# Altium PCB ZS-007.PcbDoc
Units mil, origin at the board's own origin, x right, y up, seen from the top; angles counter-clockwise.
Board outline 876.19 x 616.62 mil, 2 copper layers (Top Layer, Bottom Layer); 14 components, 10 nets, 35 pads, 13 vias.
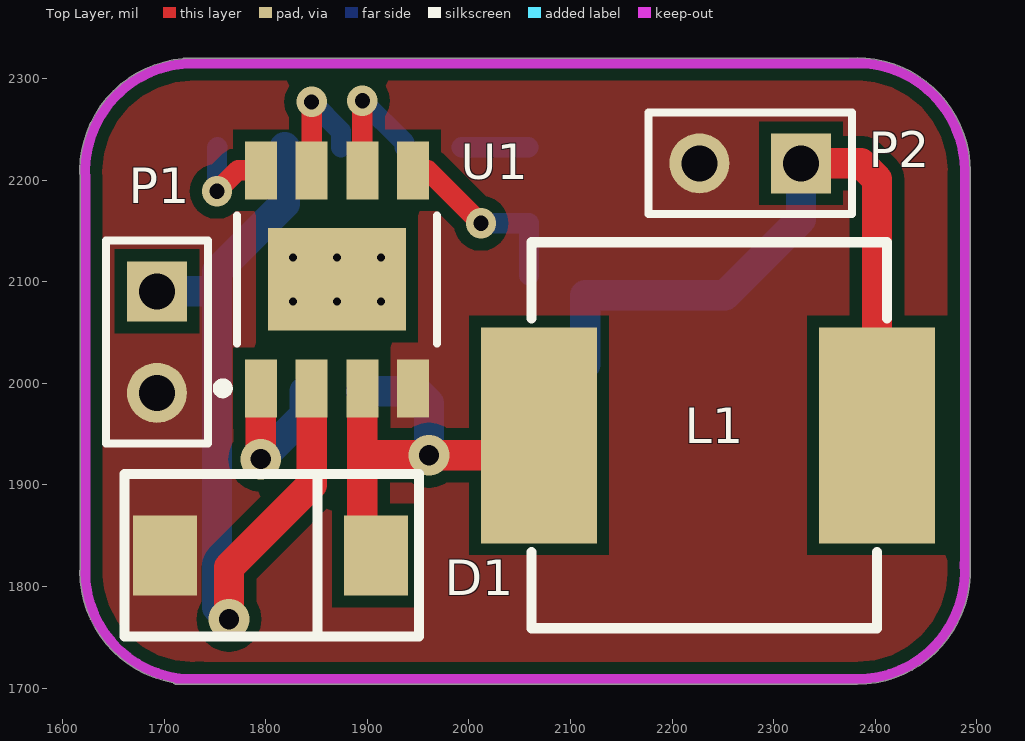
[diagram p0: Top Layer view]
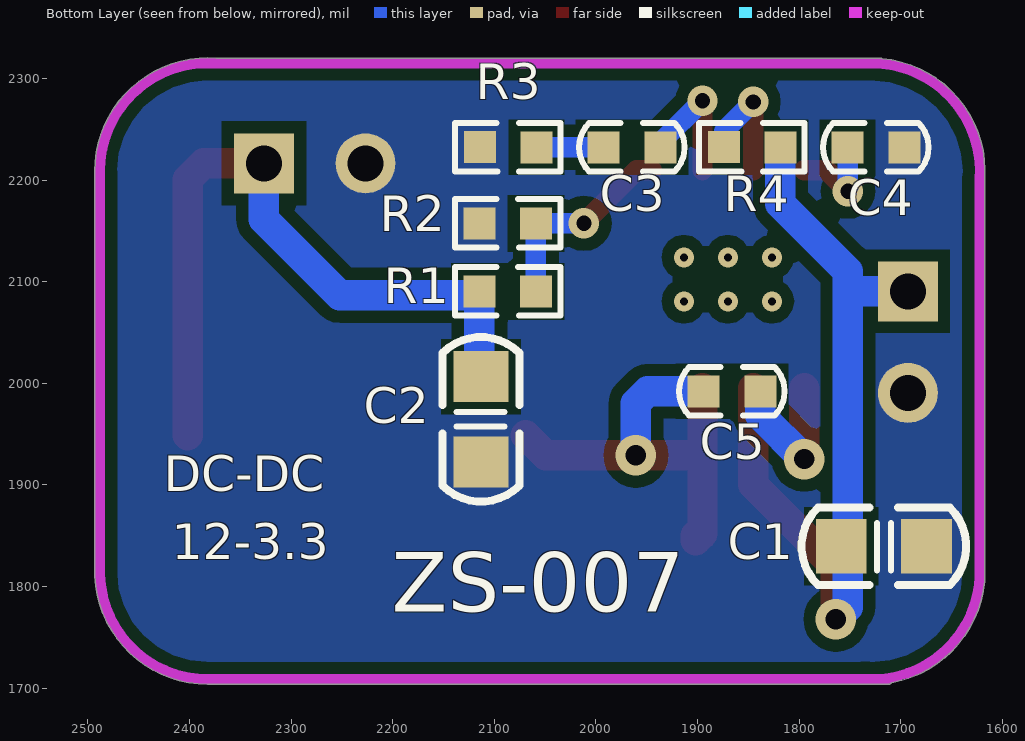
[diagram p1: Bottom Layer view, seen from below]
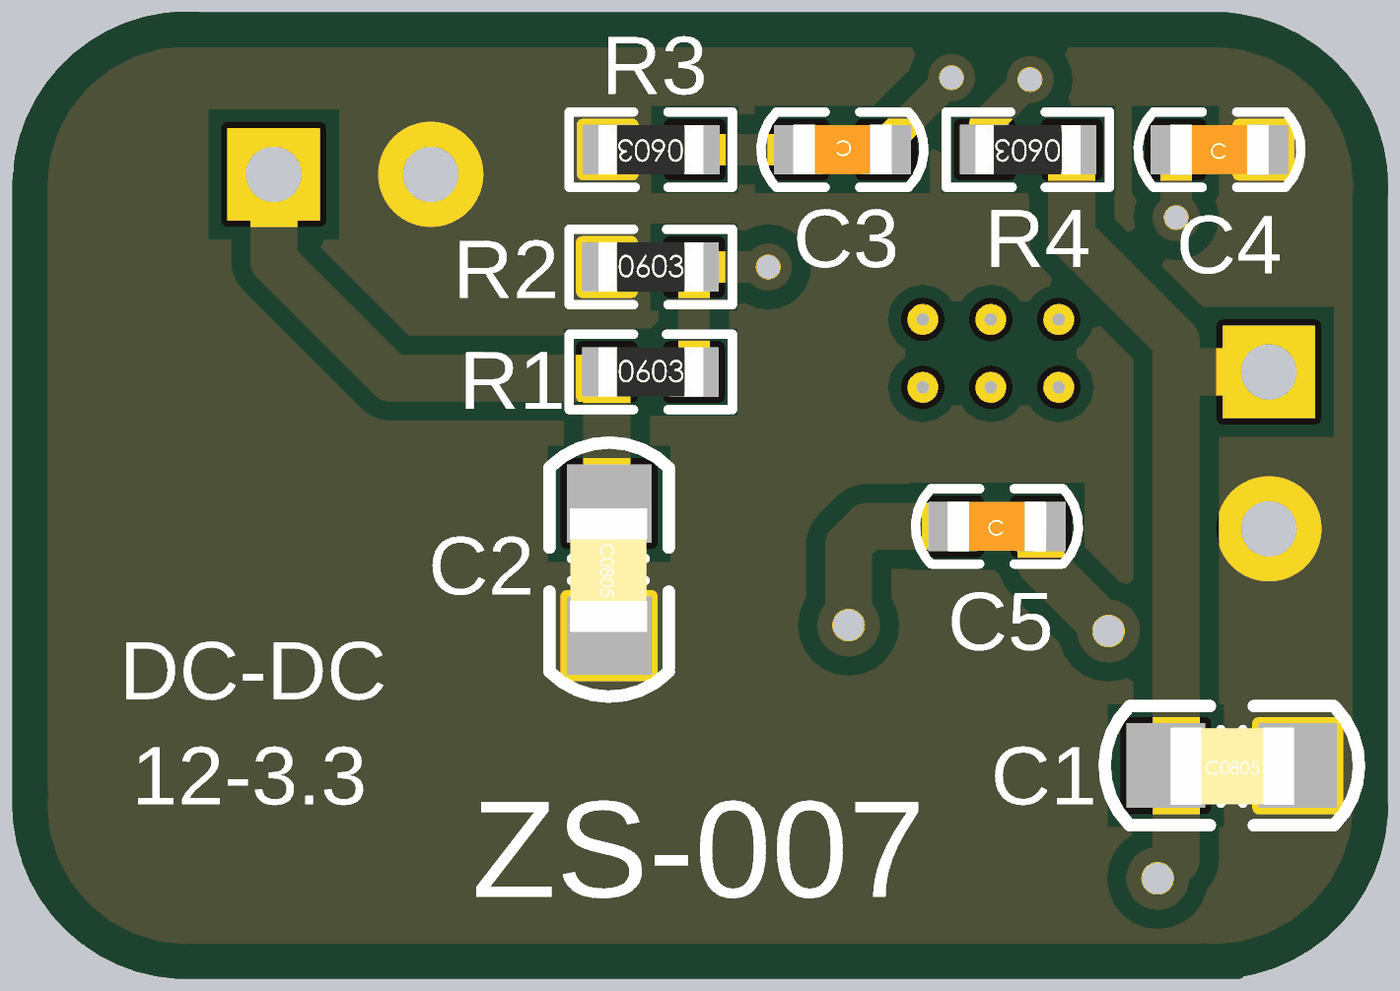
[diagram p2: 3D render of the assembled board from below, using the file's embedded part models]

## Layer stack, top to bottom
Top Solder: solder mask 0.4, Solder Resist, Dk 3.5
Top Layer: signal copper 1.4
Dielectric 1: dielectric 12.6, FR-4, Dk 4.8
Bottom Layer: signal copper 1.4
Bottom Solder: solder mask 0.4, Solder Resist, Dk 3.5

## Board outline
1708.81,1705.37 cw(c1728.35,1814.96) 1617.03,1814.96 cw(c1622.05,1814.96) 1617.32,1816.64 1617.32,2200.63 cw(c1728.35,2208.66) 1718.41,2319.53 cw(c1720.47,2314.96) 1720.47,2319.98 2373.85,2319.98 cw(c2381.89,2208.95) 2390.01,2319.97 cw(c2381.89,2208.95) 2390.26,2319.95 cw(c2381.89,2208.95) 2493.2,2208.95 2493.2,1817.15 cw(c2381.91,1814.96) 2493.23,1814.96 cw(c2381.91,1814.96) 2493.2,1812.77 2493.2,1811.05 cw(c2488.19,1811.05) 2493.12,1810.14 cw(c2381.91,1814.96) 2381.91,1703.65 1712.6,1703.65 cw(c1712.6,1708.66)

## Design rules (kind name [scope] priority, off if disabled: settings)
Clearance 铺铜12mil [InPolygon] p1: gap=12
Clearance 线间距7mil [All] p2: gap=7
DiffPairsRouting 差分线看具体阻抗要求 [All] p1: maxlimit=10 minlimit=10 mostfreqgap=10 toplayer_minwidth=15 toplayer_maxwidth=15 toplayer_prefwidth=15 bottomlayer_minwidth=15 bottomlayer_maxwidth=15 bottomlayer_prefwidth=15 maxuncoupledlength=500
PolygonConnect [All] p1: connectstyle=Direct reliefconductorwidth=10 reliefentries=4 polygonreliefangle="90 Angle" airgapwidth=10
RoutingVias 过孔大小 [All] p1: holewidth=20 width=40 viastyle="Through Hole" minholewidth=12 minwidth=24 maxholewidth=30 maxwidth=60
SolderMaskExpansion [All] p1: expansion=4
Width 线宽 [All] p1: maxlimit=50 minlimit=7 preferedwidth=10
29 further rules are at their usual default settings.

## Classes and differential pairs
component class ZS-007: C1 C2 C3 C4 C5 D1 P2 R1 R2 R3 R4

## Components (designator, comment, footprint, x,y, rotation, side; value= is the part's Value field where it differs from the comment)
C1 "Cap" c0805 1716.54,1838.58 r180 bottom
C2 "Cap" C0805 2114.17,1964.57 r270 bottom
C3 "4.7nf" C0603 1964.57,2232.28 r0 bottom
C4 "10nf" C0603 1724.41,2232.28 r180 bottom
C5 "10nf" C0603 1866.14,1992.13 r180 bottom
D1 "1N5822" "smb do214aa" 1700.79,1830.71 r0 top
L1 "Inductor" 15uh 2401.57,1948.82 r180 top
P1 "IN" HDR1X2 1692.91,2090.55 r270 top
P2 "OUT" HDR1X2 2326.77,2216.54 r180 top
R1 "16.9K" R0603 2086.61,2090.55 r180 bottom
R2 "10K" R0603 2086.61,2157.48 r180 bottom
R3 "4.7K" R0603 2086.61,2232.28 r0 bottom
R4 "1K" R0603 1846.46,2232.28 r0 bottom
U1 "MP1583" SOP8 1870.08,2102.36 r90 top

## Footprints (in the part's own frame and the unit in brackets; to place one, negate y for a bottom-side part, rotate by r counter-clockwise, add the part's x,y. Pads: shape width x height; smd on the part's side, far side on the other; paste and mask are expansions set on the pad)
15uh [mm]
  rect 2.9x5.4 smd: 1(0,0) 2(8.45,0)
  silkscreen extent -0.25,-4.83 8.64,4.83
C0603 [mm]
  rect 0.8x0.8 smd: 1(-0.711,0) 2(0.711,0)
  silkscreen extent -1.32,-0.61 1.32,0.61, body extent -0.8,-0.41 0.8,0.4, height 0.88
c0805 [mil]
  rect 50x54 smd: 1(-42,1) 2(42,1)
  silkscreen extent -81,-37 81,39, body extent -39,-24 40,25, height 20
C0805 [mil]
  rect 50x54 smd: 1(-42,1) 2(42,1)
  silkscreen extent -81,-37 81,39, body extent -39,-24 40,25, height 20
HDR1X2 [mm] "Connector; Header; 2 Position"
  rect 1.5x1.5 hole 0.9: 1(0,0)
  round 1.5 hole 0.9: 2(2.54,0)
  silkscreen extent -1.27,-1.27 3.81,1.27
R0603 [mm]
  rect 0.8x0.8 smd: 1(-0.711,0) 2(0.699,-0.002)
  silkscreen extent -1.32,-0.61 1.32,0.61, body extent -0.85,-0.4 0.85,0.4, height 0.56
"smb do214aa" [mm]
  rect 1.6x2 smd: 1(0,0) 2(5.273,-0.003)
  silkscreen extent -1.02,-2.03 6.35,2.03
SOP8 [mm] "SOP, 8-Leads, Body 5.00x4.00mm, Pitch 1.27mm, Thermal Pad 3.45x2.56mm, IPC Medium Density"
  rect 1.45x0.8 smd: 1(-2.725,1.905) 2(-2.725,0.635) 3(-2.725,-0.635) 4(-2.725,-1.905) 5(2.725,-1.905) 6(2.725,-0.635) 7(2.725,0.635) 8(2.725,1.905)
  rect 2.56x3.45 smd: 9(0,0)
  silkscreen extent -2.85,-2.5 1.6,2.98, body extent -2,-2.5 2,2.5, height 1.7

## Part data
C1 C2: library part Cap0805, "Capacitor"
C3 C4 C5: library part C
D1: library part "D Zener", "Zener Diode"
P1 P2: library part "Header 2", "Header, 2-Pin"
R1 R2 R3 R4: library part R
U1: "DC-DC Step-Down Converter"

## Via types
v1: diameter 19.68, hole 7.87, Top Layer to Bottom Layer, 6 vias
v2: diameter 30, hole 15, Top Layer to Bottom Layer, tented both sides, 4 vias
v3: diameter 40, hole 20, Top Layer to Bottom Layer, tented both sides, 3 vias

## Nets (pads, with @x,y where several pads share a name; then routed paths per layer and width w, separated by ;. In a path a pad name is that pad's centre, name@x,y a point inside that pad or via, vN(x,y) a via of type N, cw(c..) or ccw(c..) an arc to the next point about the centre after c; other vN are vias at no path point)
EN: R4.2 U1.7 | length 123.9
  Top Layer w20: U1.7 v2(1845.08,2276.97)
  Bottom Layer w20: v2(1845.08,2276.97) 1873.96,2248.09 R4.2
GND: C1.2 C2.2 C4.2 D1.1 P1.2 P2.2 R2.1 R3.2 U1.4
NetC3_1: C3.1 U1.6 | length 131.6
  Top Layer w20: U1.6 v2(1895.08,2278.15)
  Bottom Layer w20: v2(1895.08,2278.15) 1936.57,2236.66 C3.1
NetC3_2: C3.2 R3.1 | length 66
  Bottom Layer w20: C3.2 R3.1
NetC4_1: C4.1 U1.8 | length 95.2
  Top Layer w20: v2(1751.97,2188.98) 1772.64,2209.65 U1.8
  Bottom Layer w20: v2(1751.97,2188.98) 1751.97,2231.84 C4.1
NetC5_2: C5.2 U1.1 | length 154.3
  Top Layer w30: v3(1795.08,1925.39) U1.1
  Bottom Layer w30: v3(1795.08,1925.39) 1838.14,1968.46 C5.2
NetR1_2: R1.2 R2.2 U1.5 | length 186.9
  Top Layer w20: U1.5 1959.65,2209.65 v2(2011.81,2157.48)
  Bottom Layer w20: v2(2011.81,2157.48) 2059.05,2157.48 R2.2 R1.2@2059.11,2106.24
SW: C5.1 D1.2 L1.2 U1.3 | length 455
  Top Layer w30: U1.3 1895.08,1929.13 ; D1.2@1896.57,1850.28 1895.08,1851.76 1895.08,1929.13 ; D1.2@1901.57,1845.27 D1.2@1901.57,1850.28 ; L1.2 2049.21,1929.13 v3(1960.63,1929.13) 1895.08,1929.13
  Bottom Layer w30: C5.1 1948.82,1992.13 1960.63,1980.32 v3(1960.63,1929.13)
VCC3.3: C2.1 L1.1 P2.1 R1.1 | length 699.7
  Top Layer w30: P2.1 2385.83,2216.54 2401.57,2200.79 L1.1
  Bottom Layer w30: C2.1@2114.61,2018.5 2114.61,2086.61 2251.97,2086.61 2326.77,2161.42 P2.1
VCC12: C1.1 P1.1 R4.1 U1.2 | length 813.2
  Top Layer w30: v3(1763.78,1767.72) 1763.78,1818.9 1845.08,1900.2 U1.2
  Bottom Layer w30: P1.1 1748.03,2090.55 ; v3(1763.78,1767.72) 1751.97,1779.53 1751.97,2110.24 1818.46,2176.72 R4.1
pads on no net: U1.9
copper on no net:
  other v1: 1826.77,2080.71 1870.08,2080.71 1913.39,2080.71 1826.77,2124.02 1870.08,2124.02 1913.39,2124.02

## Polygon pours and split planes (outlines as drawn)
GND on Top Layer "Mechanical 15-No Net" (solid, remove dead copper, pour order 9): 1708.81,1705.37 cw(c1728.35,1814.96) 1617.03,1814.96 cw(c1622.05,1814.96) 1617.32,1816.64 1617.32,2200.63 cw(c1728.35,2208.66) 1718.41,2319.53 cw(c1720.47,2314.96) 1720.47,2319.98 2373.85,2319.98 cw(c2381.89,2208.95) 2390.01,2319.97 cw(c2381.89,2208.97) 2390.26,2319.95 cw(c2381.89,2208.95) 2493.2,2208.95 2493.2,1817.15 cw(c2381.91,1814.96) 2493.23,1814.96 cw(c2381.91,1814.96) 2493.2,1812.77 2493.2,1811.05 cw(c2488.19,1811.05) 2493.12,1810.14 cw(c2381.91,1814.96) 2381.91,1703.65 1712.6,1703.65 cw(c1712.6,1708.66)
GND on Bottom Layer "Mechanical 15-No Net" (solid, remove dead copper, pour order 10): 1708.81,1705.37 cw(c1728.35,1814.96) 1617.03,1814.96 cw(c1622.05,1814.96) 1617.32,1816.64 1617.32,2200.63 cw(c1728.35,2208.66) 1718.41,2319.53 cw(c1720.47,2314.96) 1720.47,2319.98 2373.85,2319.98 cw(c2381.89,2208.95) 2390.01,2319.97 cw(c2381.89,2208.97) 2390.26,2319.95 cw(c2381.89,2208.95) 2493.2,2208.95 2493.2,1817.15 cw(c2381.91,1814.96) 2493.23,1814.96 cw(c2381.91,1814.96) 2493.2,1812.77 2493.2,1811.05 cw(c2488.19,1811.05) 2493.12,1810.14 cw(c2381.91,1814.96) 2381.91,1703.65 1712.6,1703.65 cw(c1712.6,1708.66)

## Keep-outs
Keep-Out Layer:
  lines w10: 1622.05,1814.96 ccw(c1728.35,1814.96) 1736.2,1708.95 ; 1622.34,1807.38 1622.34,2200.81 cw(c1728.35,2208.66) 1728.35,2314.96 ; 1712.6,1708.66 2381.91,1708.66 ccw(c2381.91,1814.96) 2487.92,1822.81 ; 1720.47,2314.96 2389.76,2314.96 ; 2374.04,2314.96 cw(c2381.89,2208.95) 2488.19,2208.95 2488.19,1846.48 ; 2488.19,1811.05 2488.19,1858.27

## Silkscreen, mask and mechanical layers (free items; w line width, h text height)
Bottom Overlay:
  text "DC-DC" at 2425.2,1881.89 h60
  text "12-3.3" at 2417.32,1814.96 h60
  text "ZS-007" at 2200.79,1755.91 h100
Mechanical 15:
  lines w10: 1622.34,2039.37 1775.59,2039.37 1870.08,2039.37 1870.08,1889.76 2023.62,1889.76 2023.62,1964.57 2488.19,1964.57